# EAGLE board panel (EAGLE 9.6.2)
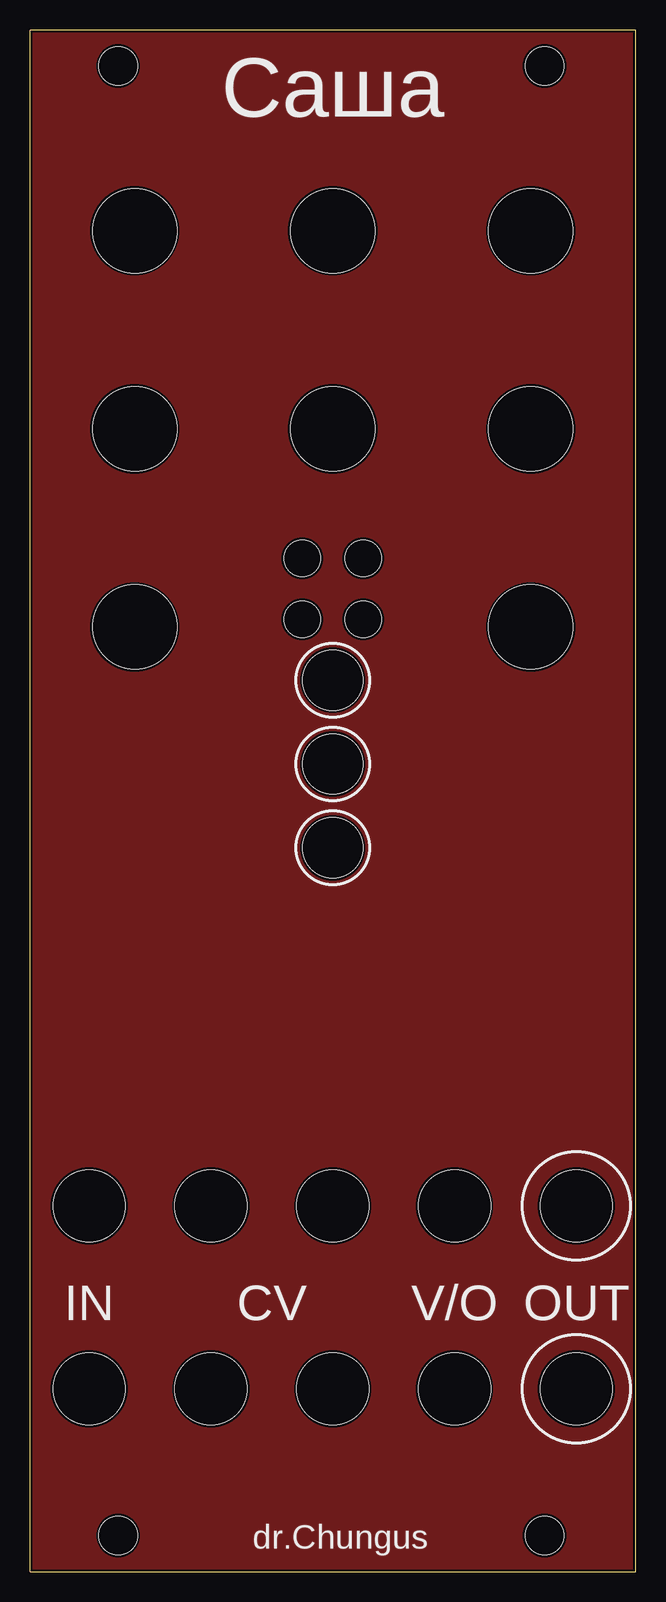
[diagram p0: board, top side]
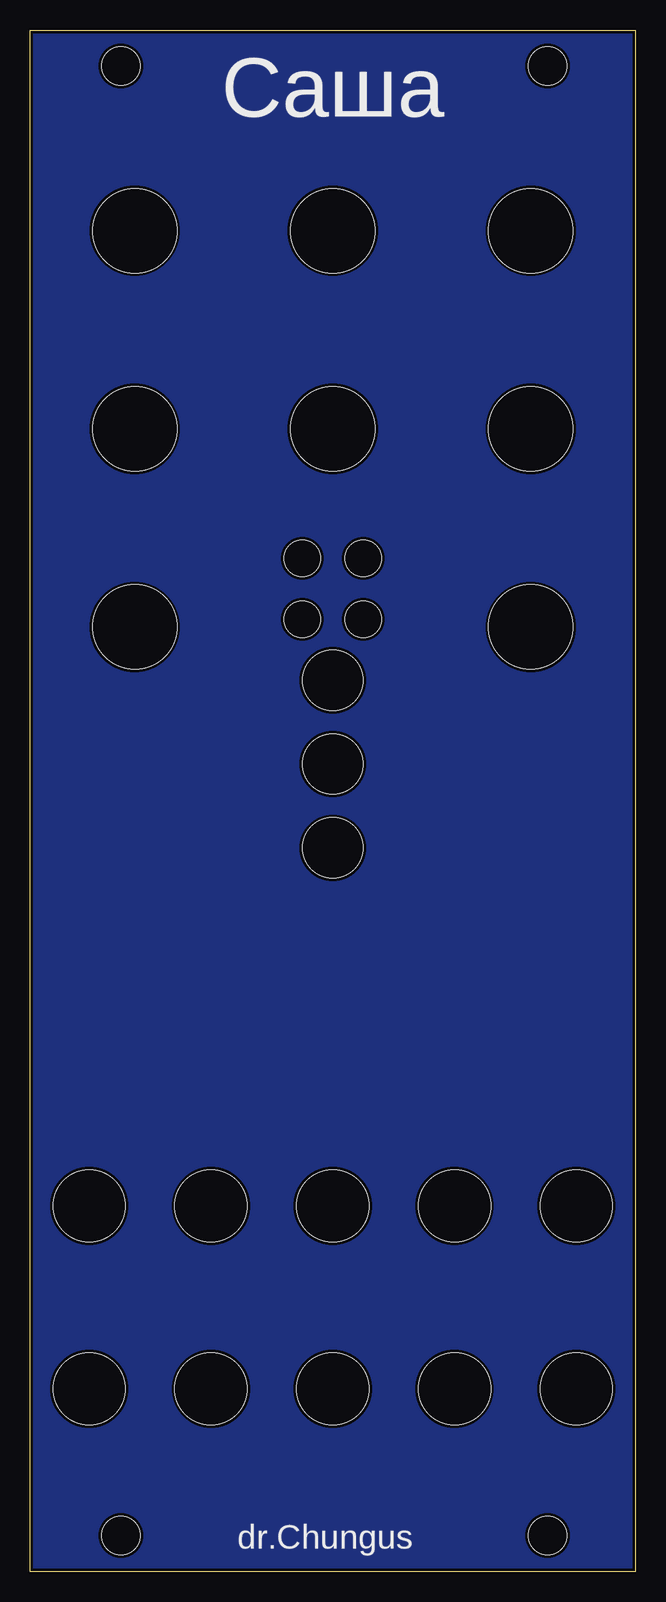
[diagram p1: board, bottom side, seen from below]

Size 50.5 x 128.5 mm. Coordinates in mm from the lower left corner, seen from the top.
Copper layers (1*16): Top 0.035559375mm / dielectric 1.6mm / Bottom 0.035559375mm
Design rules "jlcpcb2layer": minimum track width 5mil, minimum drill 12mil, track to track 5mil, track to pad 5mil, pad to pad 5mil, via to via 5mil, smd to smd 5mil, copper to edge 8mil, drill to drill 6mil, minimum pad ring 5mil, minimum via ring 3mil, stop-mask expansion 2.5mil, vias tented up to drill 0mil, thermal gap 10mil
Holes 6 mm at 4.93,30.48 15.09,30.48 25.25,30.48 35.41,30.48 45.57,30.48 4.93,15.24 15.09,15.24 25.25,15.24 35.41,15.24 45.57,15.24
Holes 5 mm at 25.25,60.33 25.25,67.31 25.25,74.3
Holes 3.02 mm at 27.79,79.38 22.71,79.38 22.71,84.45 27.79,84.45
Holes 7.01 mm at 41.76,78.74 41.76,95.25 25.25,95.25 8.74,95.25 8.74,111.76 25.25,111.76 41.76,111.76 8.74,78.74

## Footprints (pad centres in the part's own frame; a part is rotated, then mirrored left to right if it is on the bottom)
EURO_PANEL_10HP = hole 3.2: 7.5,3; 7.5,125.5; 43.06,125.5; 43.06,3

## Placement (x,y rotation side)
E$1  [EURO_PANEL_10HP]  -0.15,0 0 top

## Library data of the parts
E$1 = eurohelper

## Tracks (layer width: path | path; a pad name or v marks a point on that pad's centre or on a via)
GND
  pour Top: -0.05,128.5 50.48,128.5 50.48,-0.04 -0.05,-0.04
  pour Bottom (isolate 0.254, no thermals): -0.05,128.5 50.48,128.5 50.48,-0.04 -0.05,-0.04

## Text on the board
tNames: Саша | IN | CV | V/O | OUT | dr.Chungus
bNames: Саша | dr.Chungus